# Allegro board USBHUB_V10A.brd
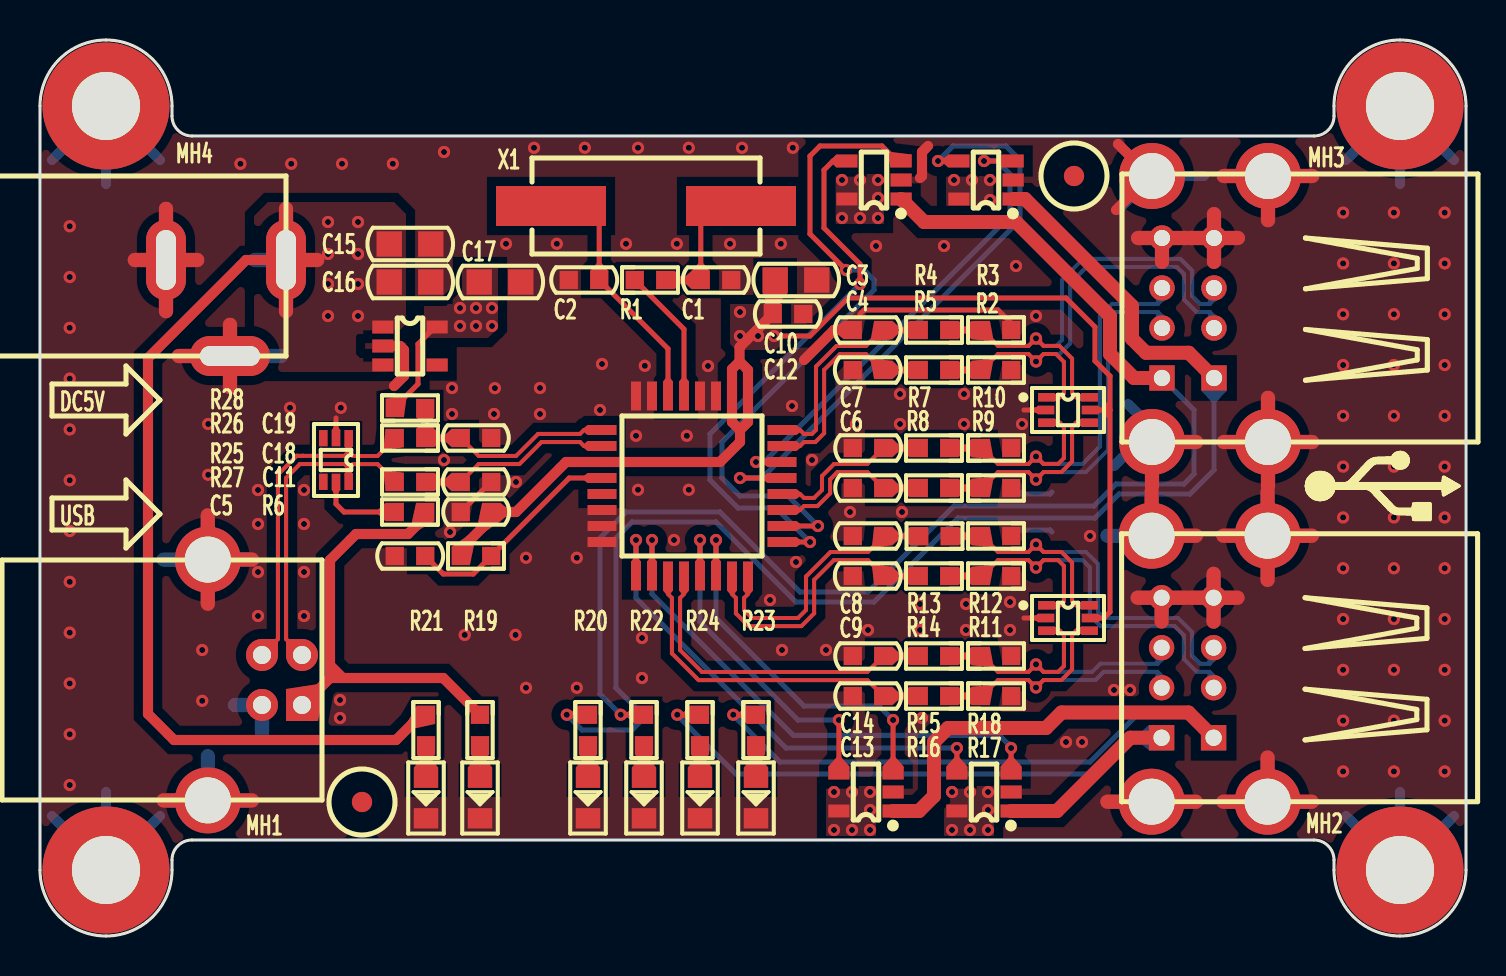
[diagram p0: board, top side]
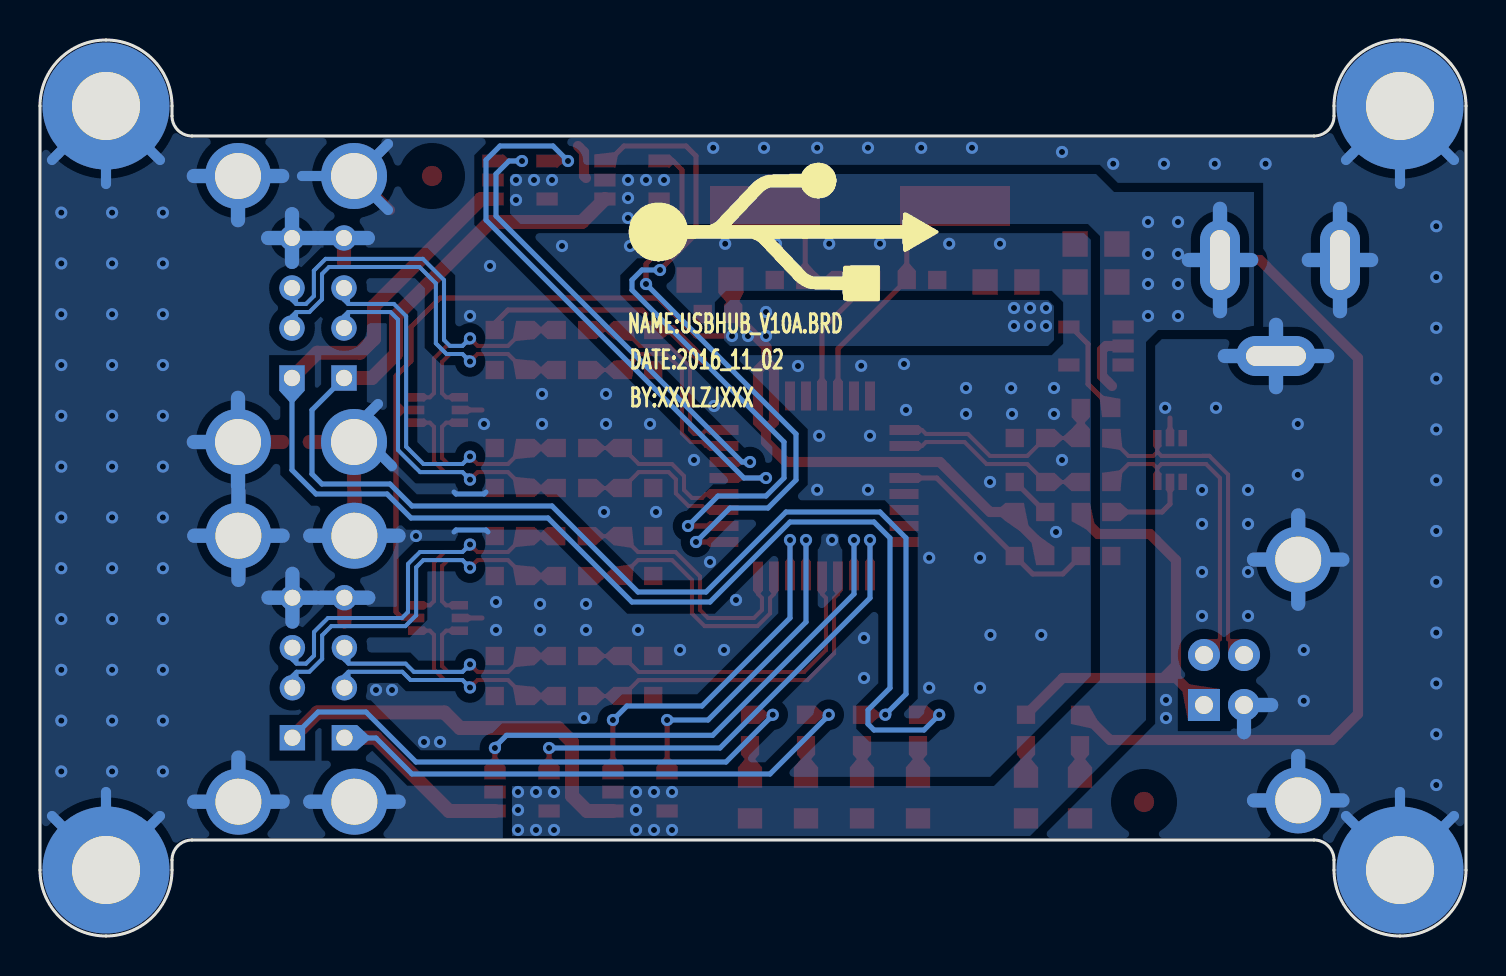
[diagram p1: board, bottom side, seen from below]

Outline 71.3 x 44.8 mm; copper layers: TOP, BOTTOM. Coordinates in mm from the lower left corner of the outline.
Outline path: 0,41.5 arc(0.97,43.83) 3.3,44.8 arc(5.63,43.83) 6.6,41.5 6.6,41 arc(6.89,40.29) 7.6,40 63.7,40 arc(64.41,40.29) 64.7,41 64.7,41.5 arc(65.67,43.83) 68,44.8 arc(70.33,43.83) 71.3,41.5 71.3,3.3 arc(70.33,0.97) 68,0 arc(65.67,0.97) 64.7,3.3 64.7,3.8 arc(64.41,4.51) 63.7,4.8 7.6,4.8 arc(6.89,4.51) 6.6,3.8 6.6,3.3 arc(5.63,0.97) 3.3,0 arc(0.97,0.97) 0,3.3 0,41.5

## Design rules (mm)
net group DP1: nets DM DP
net group DP2: nets DM0 DP0
net group DP3: nets D1+ D1-
net group DP4: nets D2+ D2-
net group DP5: nets D3+ D3-
net group DP6: nets D4+ D4-
net group DP7: nets DM1 DP1
net group DP8: nets DM2 DP2
net group DP9: nets DM3 DP3
net group DP10: nets DM4 DP4

## Placement (name value [footprint] x y rotation side)
C1  20pF_50V  [CC0603]  33.8 32.8 180 top
C2  20pF_50V  [CC0603]  27.2 32.8 0 top
C3  22pF_50V  [CC0603]  41.4 30.3 180 top
C4  22pF_50V  [CC0603]  41.4 28.3 180 top
C5  0.1uF_50V  [CC0603]  18.5 19 0 top
C6  22pF_50V  [CC0603]  41.4 22.4 0 top
C7  22pF_50V  [CC0603]  41.4 24.4 0 top
C8  22pF_50V  [CC0603]  41.4 20 180 top
C9  22pF_50V  [CC0603]  41.4 18 180 top
C10  10uF_25V  [CC0805]  37.8 32.8 0 top
C11  0.1uF_50V  [CC0603]  21.8 21.2 0 top
C12  0.1uF_50V  [CC0603]  37.4 31.1 180 top
C13  22pF_50V  [CC0603]  41.4 12 0 top
C14  22pF_50V  [CC0603]  41.4 14 0 top
C15  10uF_25V  [CC0805]  18.5 34.6 0 top
C16  10uF_25V  [CC0805]  18.5 32.7 0 top
C17  10uF_25V  [CC0805]  23 32.7 0 top
C18  22pF_50V  [CC0603]  21.8 22.7 180 top
C19  22pF_50V  [CC0603]  21.8 24.9 180 top
D1  LED_GREEN  [LED0805]  22 6.9 270 top
D2  LED_GREEN  [LED0805]  27.4 6.9 270 top
D3  LED_GREEN  [LED0805]  19.3 6.9 270 top
D4  LED_GREEN  [LED0805]  30.2 6.9 270 top
D5  LED_GREEN  [LED0805]  35.8 6.9 270 top
D6  LED_GREEN  [LED0805]  33 6.9 270 top
DC1  -  [DC005]  6.3 33.8 0 top
MH1  Hold  [HOLD250D134]  3.3 3.3 0 top
MH2  Hold  [HOLD250D134]  68 3.3 0 top
MH3  Hold  [HOLD250D134]  68 41.5 0 top
MH4  Hold  [HOLD250D134]  3.3 41.5 0 top
MP1  MarkPoint  [MARKPOINT_R3]  16.1 6.7 0 top
MP2  MarkPoint  [MARKPOINT_R3]  51.7 38 0 top
NOREF  -  []  0 5.1 0 top
NOREF#2  -  []  3.3 0 90 top
R1  1.5K  [RC0603]  30.5 32.8 180 top
R2  15K  [RC0603]  47.8 28.3 0 top
R3  15K  [RC0603]  47.8 30.3 0 top
R4  27R  [RC0603]  44.7 30.3 0 top
R5  27R  [RC0603]  44.7 28.3 0 top
R6  100K  [RC0603]  21.8 19 0 top
R7  27R  [RC0603]  44.7 24.4 0 top
R8  27R  [RC0603]  44.7 22.4 0 top
R9  15K  [RC0603]  47.8 22.4 180 top
R10  15K  [RC0603]  47.8 24.4 180 top
R11  15K  [RC0603]  47.8 18 0 top
R12  15K  [RC0603]  47.8 20 0 top
R13  27R  [RC0603]  44.72 19.99 0 top
R14  27R  [RC0603]  44.7 18 0 top
R15  27R  [RC0603]  44.7 14 0 top
R16  27R  [RC0603]  44.7 12 0 top
R17  15K  [RC0603]  47.8 12 180 top
R18  15K  [RC0603]  47.8 14 180 top
R19  2K  [RC0603]  22 10.3 90 top
R20  2K  [RC0603]  27.4 10.3 90 top
R21  2K  [RC0603]  19.3 10.3 90 top
R22  2K  [RC0603]  30.2 10.3 90 top
R23  2K  [RC0603]  35.8 10.3 90 top
R24  2K  [RC0603]  33 10.3 90 top
R25  27R  [RC0603]  18.5 22.7 0 top
R26  27R  [RC0603]  18.5 24.9 0 top
R27  10K  [RC0603]  18.5 21.2 0 top
R28  1.5K  [RC0603]  18.5 26.4 180 top
U1  TUSB2046BVFR  [LQFP-32]  32.6 22.5 270 top
U2  NUP4202W1T2G  [SC-88]  51.4 26.3 0 top
U3  NUP4202W1T2G  [SC-88]  51.4 15.9 0 top
U4  TPS2051BDBVR  [SOT23-5]  47.3 37.8 90 top
U5  TPS2051BDBVR  [SOT23-5]  41.7 37.8 90 top
U6  SPX3819M5-L-3-3/TR  [SOT23-5]  18.5 29.5 270 top
U7  TPS2051BDBVR  [SOT23-5]  41.3 7.2 90 top
U8  TPS2051BDBVR  [SOT23-5]  47.2 7.2 90 top
U9  NUP4202W1T2G  [SC-88]  14.8 23.8 270 top
USB1  -  [USB-A-DOUBLE]  56.1 31.4 0 top
USB2  -  [USB-A-DOUBLE]  56.08 13.41 0 top
USB3  -  [USB-B]  13.1 12.8 270 top
X1  XTAL_6MHz_X49SM6MSD2SC  [X-HC-49SMD]  30.3 36.5 0 top

## Library data of the parts
C1-C9 C11-C14 C18 C19 = CAP NP
C10 = C_Generic
C15-C17 = CAP NP_2
D1-D6 = LED_4
DC1 = DC005
MH1-MH4 = Hold_1
MP1 MP2 = MarkPoint
R1-R28 = R_Generic
U1 = TUSB2046BVFR
U2 U3 U9 = nup2202w1_D_2
U4 U5 U7 U8 = TPS2051BDBVR
U6 = SPX3819M5-L-1-2
USB1 USB2 = USB-A-DOUBLE
USB3 = USB-B
X1 = XTAL_5032_0

## Footprints (pads in the part's own frame, mm; a bottom-side part is the same pattern mirrored in y, then rotated)
CC0603
  rect 0.914x0.914 smd: 1(-0.762,0) 2(0.762,0)
CC0805
  rect 1.27x1.27 smd: 1(-1.041,0) 2(1.041,0)
DC005
  oval 2x4 hole 1x3: 1(6,0) 2(0,0)
  oval 4x2 hole 3x1: 3(3.2,-4.8)
HOLD250D134
  round 6.35 hole 3.404: 1(0,0)
LED0805
  rect 1.016x1.219 smd: 1(-1.016,0) 2(1.016,0)
LQFP-32
  rect 0.5x1.45 smd: 1(-2.8,-4.5) 2(-2,-4.5) 3(-1.2,-4.5) 4(-0.4,-4.5) 5(0.4,-4.5) 6(1.2,-4.5) 7(2,-4.5) 8(2.8,-4.5) 17(2.8,4.5) 18(2,4.5) 19(1.2,4.5) 20(0.4,4.5) 21(-0.4,4.5) 22(-1.2,4.5) 23(-2,4.5) 24(-2.8,4.5)
  rect 1.45x0.5 smd: 9(4.5,-2.8) 10(4.5,-2) 11(4.5,-1.2) 12(4.5,-0.4) 13(4.5,0.4) 14(4.5,1.2) 15(4.5,2) 16(4.5,2.8) 25(-4.5,2.8) 26(-4.5,2) 27(-4.5,1.2) 28(-4.5,0.4) 29(-4.5,-0.4) 30(-4.5,-1.2) 31(-4.5,-2) 32(-4.5,-2.8)
MARKPOINT_R3
  round 1.016 smd: 1(0,0)
RC0603
  rect 0.914x0.914 smd: 1(-0.762,0) 2(0.762,0)
SC-88
  rect 0.813x0.432 smd: 1(-1.092,0.635) 2(-1.092,0) 3(-1.092,-0.635) 4(1.092,-0.635) 5(1.092,0) 6(1.092,0.635)
SOT23-5
  rect 0.65x1.06 smd: 1(-0.95,-1.354) 2(0,-1.354) 3(0.95,-1.354) 4(0.95,1.354) 5(-0.95,1.354)
USB-A-DOUBLE
  rect 1.27x1.27 hole 0.813: 1(2.6,-3.5) 5(0,-3.5)
  round 1.27 hole 0.8: 2(2.6,-1) 3(2.6,1) 4(2.6,3.5) 6(0,-1) 7(0,1) 8(0,3.5)
  round 3.3 hole 2.3: 9(-0.5,6.6) 10(5.3,6.6) 11(5.3,-6.7) 12(-0.5,-6.7)
USB-B
  rect 1.6x1.6 hole 0.9: 1(1.25,0)
  round 1.6 hole 0.9: 2(-1.25,0) 3(-1.25,-2) 4(1.25,-2)
  round 3.3 hole 2.3: 5(6.02,-4.71) 6(-6.02,-4.71)
X-HC-49SMD
  rect 5.5x2 smd: 1(-4.75,0) 2(4.75,0)

## Nets
GND: C1.1 C2.1 C3.2 C4.2 C5.1 C6.1 C7.1 C8.2 C9.2 C10.2 C11.1 C12.1 C13.1 C14.1 C15.2 C16.2 C17.2 C18.1 C19.1 D1.2(CATHODE) D2.2(CATHODE) D3.2(CATHODE) D4.2(CATHODE) D5.2(CATHODE) D6.2(CATHODE) DC1.2 DC1.3 MH1.1 MH2.1 MH3.1 MH4.1 R2.2 R3.2 R9.1 R10.1 R11.2 R12.2 R17.1 R18.1 U1.6(EEDATA/GANGED) U1.7(GND_1) U1.8(BUSPWR) U1.27(TSTPLL/48MCLK) U1.28(GND_2) U1.31(TSTMODE) U1.32(SUSPEND) U2.2 U3.2 U4.2(GND) U5.2(GND) U6.2(GND) U7.2(GND) U8.2(GND) U9.2 USB1.4(GND_1) USB1.8(GND_2) USB1.9(S_1) USB1.10(S_2) USB1.11(S_3) USB1.12(S_4) USB2.4(GND_1) USB2.8(GND_2) USB2.9(S_1) USB2.10(S_2) USB2.11(S_3) USB2.12(S_4) USB3.4(GND) USB3.5(S1) USB3.6(S2)
VBUS: R19.2 R27.2 USB3.1(VBUS)
VCC_3V3: C10.1 C11.2 C12.2 C17.1 R6.1 R28.2 U1.3(VCC_1) U1.25(VCC_2) U1.26(E\X\T\M\E\M\) U2.5 U3.5 U6.5(VOUT)
VCC_+5V: C15.1 C16.1 DC1.1 R21.2 U4.5(IN) U5.5(IN) U6.1(VIN) U6.3(EN) U7.5(IN) U8.5(IN)
VCC_VOUT1: R24.2 U8.1(OUT) USB2.5(VCC_2)
VCC_VOUT2: R23.2 U7.1(OUT) USB2.1(VCC_1)
VCC_VOUT3: R22.2 U5.1(OUT) USB1.5(VCC_2)
VCC_VOUT4: R20.2 U4.1(OUT) USB1.1(VCC_1)
#EN1: U1.9(P\W\R\O\N\1\) U8.4(E\N\)
#EN2: U1.13(P\W\R\O\N\2\) U7.4(E\N\)
#EN3: U1.17(P\W\R\O\N\3\) U5.4(E\N\)
#EN4: U1.21(P\W\R\O\N\4) U4.4(E\N\)
#OC1: U1.10(O\C\1\) U8.3(O\C\)
#OC2: U1.14(O\C\2\) U7.3(O\C\)
#OC3: U1.18(O\C\3\) U5.3(O\C\)
#OC4: U1.22(O\C\4\) U4.3(O\C\)
D1+: R15.2 R18.2 U3.3 USB2.7(D+_2)
D1-: R16.2 R17.2 U3.4 USB2.6(D-_2)
D2+: R12.1 R13.2 U3.6 USB2.3(D+_1)
D2-: R11.1 R14.2 U3.1 USB2.2(D-_1)
D3+: R7.2 R10.2 U2.3 USB1.7(D+_2)
D3-: R8.2 R9.2 U2.4 USB1.6(D-_2)
D4+: R3.1 R4.2 U2.6 USB1.3(D+_1)
D4-: R2.1 R5.2 U2.1 USB1.2(D-_1)
DM: R25.1 U9.6 USB3.2(D-)
DM0: C18.2 R25.2 U1.2(DM0)
DM1: C13.2 R16.1 U1.11(DM1)
DM2: C9.1 R14.1 U1.15(DM2)
DM3: C6.2 R8.1 U1.19(DM3)
DM4: C4.1 R5.1 U1.23(DM4)
DP: R26.1 U9.1 USB3.3(D+)
DP0: C19.2 R26.2 R28.1 U1.1(DP0)
DP1: C14.2 R15.1 U1.12(DP1)
DP2: C8.1 R13.1 U1.16(DP2)
DP3: C7.2 R7.1 U1.20(DP3)
DP4: C3.1 R4.1 U1.24(DP4)
N16723135: C2.2 U1.30(XTAL1) X1.1
N16723141: C1.2 R1.1 X1.2
N16723193: D2.1(ANODE) R20.1
N16723303: R27.1 U9.5
N16750283: R1.2 U1.29(XTAL2)
N16751723: C5.2 R6.2 U1.4(R\E\S\E\T\)
N16761860: D4.1(ANODE) R22.1
N16762072: D5.1(ANODE) R23.1
N16762283: D6.1(ANODE) R24.1
N16762604: D1.1(ANODE) R19.1
N16762654: D3.1(ANODE) R21.1

Pads without a net: MP1 1; MP2 1; U1 5; U6 4; U9 3 4

## Via types
v1: diameter 0.61, hole 0.305, TOP to BOTTOM, 209 vias

## Routing (per net, layer and track width the routed paths; a pad name or vN(x,y) marks a point on that pad's centre or on a via; arc(x,y) is an arc through that point)
GND: length 260.5
  TOP w0.254: U9.2 14.8,25.9 ; U2.2 49.2,26.3 ; C11.1 22.54,22.7 C18.1 ; R3.2 48.56,30.64 47.9,31.3 41.2,31.3 41,31.1 ; U3.2 49.2,15.9
  TOP w0.508: USB1.9 55.5,38 ; 55.5,38 53.8,36.3 ; 55.5,38 53.9,39.6 ; C3.2 39.7,30.3 38.2,28.8 ; 17.7,27.5 18.2,28 18.2,29.3 18,29.5 U6.2 ; 44.4,39.5 44.1,39.2 44.1,38 44,37.9
  TOP w0.711: 57.49,16.91 USB2.4 ; USB2.4 58.68,18.11 ; USB2.4 58.68,15.72 ; USB2.4 59.87,16.91 ; 57.79,6.71 USB2.12 53.37,6.71 ; USB2.10 63.59,20.01 ; USB2.10 59.17,20.01 ; USB2.10 61.38,22.22 ; USB2.10 61.38,17.81 ; USB1.8 57.29,34.9 ; USB1.8 54.91,34.9 ; USB1.8 56.1,33.71 ; DC1.2 6.3,36.36 ; DC1.2 6.3,31.24 ; DC1.2 4.74,33.8 ; DC1.2 7.86,33.8 ; USB1.10 63.61,38 ; USB1.10 59.19,38 ; USB1.10 61.4,35.79 ; USB2.11 63.59,6.71 ; USB2.11 61.38,8.92 ; USB2.11 59.17,6.71 ; USB1.11 61.4,26.91 ; USB1.11 63.61,24.7 ; USB1.11 59.19,24.7 ; USB1.11 61.4,22.49 ; 57.51,34.9 USB1.4 ; USB1.4 58.7,33.71 ; USB1.4 58.7,36.09 ; USB1.4 59.89,34.9 ; 9.5,27.44 DC1.3 ; DC1.3 9.5,30.56 ; DC1.3 6.94,29 ; 55.6,22.49 USB1.12 57.81,24.7 ; 54.89,16.91 USB2.8 ; USB2.8 56.08,15.72 ; USB2.8 57.27,16.91 ; 10.6,6.78 USB3.5 6.18,6.78 ; 55.58,22.22 USB2.9 57.79,20.01 ; USB3.6 10.6,18.82 ; USB3.6 8.39,21.03 ; USB3.6 8.39,16.61
  BOTTOM w0.254: 48.9,20.2 49,20.3 50.5,20.3 50.6,20.2 ; 49,22.2 49.1,22.1 50.5,22.1 50.6,22.2
  BOTTOM w0.508: USB1.9 53.9,36.3 ; USB1.9 58.2,38 ; USB1.9 55.5,38 53.9,39.6 ; 54.4,26.6 55.6,25.4 USB1.12 54.9,24.7 53.7,23.5 ; MH2.1 68,7.2 ; MH2.1 65.3,6 ; MH2.1 70.7,6 ; MH3.1 70.7,38.8 ; MH3.1 65.3,38.8 ; MH3.1 68,37.6 ; MH1.1 0.6,6 ; MH1.1 6,6 ; MH1.1 3.3,7.2 ; MH4.1 0.6,38.8 ; MH4.1 6,38.8 ; MH4.1 3.3,37.6
  BOTTOM w0.711: DC1.3 12.06,29 ; DC1.3 9.5,27.44 ; DC1.3 9.5,30.56 ; DC1.3 6.94,29 ; USB2.11 63.59,6.71 ; USB2.11 61.38,8.92 ; USB2.11 59.17,6.71 ; 57.51,34.9 USB1.4 ; USB1.4 58.7,33.71 ; USB1.4 58.7,36.09 ; USB1.4 59.89,34.9 ; 53.37,20.01 USB2.9 57.79,20.01 ; 59.19,38 USB1.10 ; USB1.10 61.4,35.79 ; USB1.10 63.61,38 ; USB3.5 8.39,8.99 ; USB3.5 6.18,6.78 ; USB3.5 10.6,6.78 ; 54.89,16.91 USB2.8 57.27,16.91 ; USB2.4 59.87,16.91 ; USB2.4 58.68,15.72 ; USB2.4 58.68,18.11 ; USB2.4 57.49,16.91 ; 57.79,6.71 USB2.12 53.37,6.71 ; USB1.11 63.61,24.7 ; USB1.11 61.4,26.91 ; USB1.11 61.4,22.49 ; 59.17,20.01 USB2.10 ; USB2.10 63.59,20.01 ; USB2.10 61.38,22.22 ; USB2.10 61.38,17.81 ; USB3.6 8.39,21.03 ; USB3.6 6.18,18.82 ; USB3.6 10.6,18.82 ; USB3.6 8.39,16.61 ; 4.74,33.8 DC1.2 ; DC1.2 6.3,36.36 ; DC1.2 6.3,31.24 ; DC1.2 7.86,33.8 ; 57.29,34.9 USB1.8 54.91,34.9 ; 11.1,10.19 USB3.4 9.74,11.55
  vias: v1(1.49,35.49) v1(1.49,32.95) v1(1.49,30.41) v1(1.49,27.87) v1(1.49,25.33) v1(1.49,22.79) v1(1.49,20.25) v1(1.49,17.71) v1(1.49,15.17) v1(1.49,12.63) v1(1.49,10.09) v1(1.49,7.55) v1(8.11,14.3) v1(8.11,11.76) v1(8.41,25.6) v1(8.41,23.06) v1(10.02,38.61) v1(10.9,22.3) v1(10.9,20.6) v1(10.9,18.2) v1(10.9,16) v1(12.5,26.41) v1(12.56,38.61) v1(13.2,22.3) v1(13.2,20.6) v1(13.2,18.2) v1(13.2,16) v1(15.04,26.41) v1(15,11.8) v1(15,10.9) v1(15.1,38.61) v1(17.64,38.61) v1(20.2,39.2) v1(20.2,23.8) v1(20.5,20.2) v1(20.6,27.4) v1(20.6,26.1) v1(21.24,15.05) v1(22.74,27.39) v1(22.7,26.1) v1(23.3,34.61) v1(23.8,22.7) v1(23.78,15.05) v1(24.3,18.91) v1(24.3,12.41) v1(24.7,39.41) v1(25,27.4) v1(25,26.1) v1(25.84,34.61) v1(26.84,18.91) v1(26.84,12.41) v1(27.24,39.41) v1(28,26.3) v1(28.1,28.6) v1(29.3,34.61) v1(29.8,25.01) v1(29.9,39.41) v1(29.9,22.31) v1(30.1,14.9) v1(30.1,12.9) v1(30.24,28.51) v1(31.7,19.8) v1(31.84,34.61) v1(32.34,25.01) v1(32.44,39.41) v1(32.44,22.31) v1(33.4,28.5) v1(34.5,34.61) v1(35.1,39.41) v1(36.5,16.8) v1(37.04,34.61) v1(37.1,14.3) v1(37.64,39.41) v1(37.6,26.5) v1(37.8,18.7) v1(38.6,23.8) v1(39.3,14.3) v1(40.5,21.2) v1(40.8,25.6) v1(41.4,15.3) v1(41.8,34.5) v1(43,27.1) v1(43,25.6) v1(43.1,21.2) v1(44,16.6) v1(44,15.3) v1(44.1,10.9) v1(45.2,34.5) v1(46.2,27.1) v1(46.2,25.6) v1(46.3,16.6) v1(46.3,15.3) v1(48.5,16.7) v1(48.5,15.3) v1(48.8,33.5) v1(49.1,25.6) v1(49.8,31) v1(51.3,9.7) v1(52.1,9.7) v1(52.5,20) v1(53.7,12.3) v1(54.5,12.3) v1(65.16,36.17) v1(65.16,33.63) v1(65.16,31.09) v1(65.16,28.55) v1(65.16,26.01) v1(65.16,23.47) v1(65.16,20.93) v1(65.16,18.39) v1(65.16,15.85) v1(65.16,13.31) v1(65.16,10.77) v1(65.16,8.23) v1(67.7,36.17) v1(67.7,33.63) v1(67.7,31.09) v1(67.7,28.55) v1(67.7,26.01) v1(67.7,23.47) v1(67.7,20.93) v1(67.7,18.39) v1(67.7,15.85) v1(67.7,13.31) v1(67.7,10.77) v1(67.7,8.23) v1(70.24,36.17) v1(70.24,33.63) v1(70.24,31.09) v1(70.24,28.55) v1(70.24,26.01) v1(70.24,23.47) v1(70.24,20.93) v1(70.24,18.39) v1(70.24,15.85) v1(70.24,13.31) v1(70.24,10.77) v1(70.24,8.23)
VBUS: length 22
  TOP w0.508: 14.5,12.9 13.15,11.55 USB3.1 ; 14.5,12.9 20.16,12.9 R19.2 ; 14.5,12.9 14.5,18.8 15.8,20.1 18.4,20.1 19.26,20.96 R27.2
VCC_3V3: length 68.9
  TOP w0.254: 53.5,26.3 53.5,28 52.75,28.75 52.75,30.45 51.3,31.9 40.4,31.9 38.5,30 v1(36.7,30) 36.8,29.9 ; 53.5,26.3 53.5,16.2 53.2,15.9 U3.5 ; 53.5,26.3 U2.5 ; R28.2 17.74,26.44 18.9,27.6 18.9,29.6 19.75,30.45 U6.5
  TOP w0.508: 34.98,28.72 34.98,29.44 C12.2 36.64,32.68 C10.1 ; 34.98,28.72 35.4,28.3 U1.25 35.4,25.7 35,25.3 ; 34.98,28.72 34.6,28.34 U1.26 34.6,25.7 35,25.3 ; 35,25.3 35,24.7 34,23.7 U1.3 26.3,23.7 23.8,21.2 C11.2 22.56,20.86 21.04,19.34 R6.1
  vias: v1(21,31.4) v1(21,30.5) v1(21.8,31.4) v1(21.8,30.5) v1(22.6,31.4) v1(22.6,30.5) v1(35,31.2) v1(35,30) v1(35.9,30)
VCC_+5V: length 56.6
  TOP w0.508: DC1.1 10.3,33.8 5.4,28.9 5.4,11.1 6.7,9.8 17.8,9.8 19.06,11.06 R21.2
  TOP w0.711: 12.3,31.24 DC1.1 ; DC1.1 12.3,36.36 ; DC1.1 13.86,33.8
  BOTTOM w0.711: 12.3,31.24 DC1.1 ; DC1.1 13.86,33.8 ; DC1.1 12.3,36.36 ; DC1.1 10.74,33.8
  vias: v1(14.4,35.7) v1(14.4,34.1) v1(14.4,32.6) v1(14.4,31) v1(15.9,35.7) v1(15.9,34.1) v1(15.9,32.6) v1(15.9,31) v1(39.7,7.2) v1(39.7,5.3) v1(40.1,37.8) v1(40.1,35.9) v1(40.6,7.2) v1(40.6,5.3) v1(41,37.8) v1(41,35.9) v1(41.5,7.2) v1(41.5,6.3) v1(41.5,5.3) v1(41.9,37.8) v1(41.9,36.9) v1(41.9,35.9) v1(45.6,7.2) v1(45.6,5.3) v1(45.7,37.8) v1(46.5,7.2) v1(46.5,5.3) v1(46.6,37.8) v1(47.4,7.2) v1(47.4,6.3) v1(47.4,5.3) v1(47.5,37.8) v1(47.5,36.8)
VCC_VOUT1: length 36.4
  TOP w0.254: R24.2 v1(31.86,11.06)
  TOP w0.7: USB2.5 54.51,9.91 50.85,6.25 U8.1
  BOTTOM w0.254: v1(31.86,11.06) 31.86,11.04 34.8,8.1 52.7,8.1 54.5,9.9 56.07,9.9 USB2.5
VCC_VOUT2: length 47.9
  TOP w0.254: R23.2 v1(34.66,11.06)
  TOP w0.7: USB2.1 58.68,9.92 57.42,11.18 51.08,11.18 50.3,10.4 45.4,10.4 44.7,9.7 44.7,7 43.95,6.25 U7.1
  BOTTOM w0.254: USB2.1 57.39,11.2 55,11.2 52.5,8.7 37,8.7 34.66,11.04 v1(34.66,11.06)
VCC_VOUT3: length 68.1
  TOP w0.254: R22.2 v1(29.04,11.06)
  TOP w0.7: USB1.5 54.7,27.9 53.5,29.1 53.5,31 48.8,35.7 44.2,35.7 U5.1
  BOTTOM w0.254: USB1.5 57.7,26.3 57.7,23.1 57.2,22.6 53.8,22.6 52.7,21.5 45.7,21.5 41.4,17.2 38,17.2 34,21.2 29.3,21.2 28,19.9 28,12.1 v1(29.04,11.06)
VCC_VOUT4: length 68.8
  TOP w0.254: R20.2 v1(26.34,11.06)
  TOP w0.7: USB1.1 57.44,29.16 55.3,29.16 54.6,29.86 54.6,31.5 49.25,36.85 U4.1
  BOTTOM w0.254: v1(26.34,11.06) 27.1,10.3 29.6,10.3 29.9,10.6 29.9,11.3 28.8,12.4 28.8,19.9 29.6,20.7 33.8,20.7 37.8,16.7 41.7,16.7 45.9,20.9 52.75,20.9 53.95,22.1 57.5,22.1 58.7,23.3 USB1.1
#EN1: length 25.1
  TOP w0.254: U1.9 v1(29.8,19.8) ; U8.4 v1(45.85,9.4)
  BOTTOM w0.254: v1(29.8,19.8) 29.8,16.9 37.3,9.4 v1(45.85,9.4)
#EN2: length 17.5
  TOP w0.254: U7.4 v1(39.95,10.8) ; v1(33,19.8) U1.13
  BOTTOM w0.254: v1(39.95,10.8) 37.9,10.8 33,15.7 v1(33,19.8)
#EN3: length 28.4
  TOP w0.254: U1.17 v1(38.5,19.7) ; v1(41,32.6) 41,33.6 39.2,35.4 39.2,38.3 39.65,38.75 U5.4
  BOTTOM w0.254: v1(38.5,19.7) 36.8,21.4 34.9,21.4 33.5,22.8 33.5,25.1 v1(41,32.6)
#EN4: length 30.2
  TOP w0.254: U1.21 v1(35,22.9) ; U4.4 v1(44.9,38.75)
  BOTTOM w0.254: v1(35,22.9) 36.1,22.9 49,35.8 49,38.8 48.3,39.5 45.65,39.5 v1(44.9,38.75)
#OC1: length 26.9
  TOP w0.254: v1(30.6,19.8) U1.10 ; U8.3 v1(48.55,9.4)
  BOTTOM w0.254: v1(48.55,9.4) 48.55,9.45 47.97,10.04 37.66,10.04 30.6,17.1 v1(30.6,19.8)
#OC2: length 19.3
  TOP w0.254: v1(33.8,19.8) U1.14 ; U7.3 v1(42.65,10.8)
  BOTTOM w0.254: v1(42.65,10.8) 41.95,11.5 38.2,11.5 33.8,15.9 v1(33.8,19.8)
#OC3: length 33.8
  TOP w0.254: U1.18 v1(38.9,20.5) ; U5.3 42.85,38.75 42.1,39.5 39,39.5 38.5,39 38.5,35.1 v1(40.3,33.3)
  BOTTOM w0.254: v1(38.9,20.5) 37.4,22 35,22 34.1,22.9 34.1,24.7 41.7,32.3 41.7,32.8 41.2,33.3 v1(40.3,33.3)
#OC4: length 24.2
  TOP w0.254: U1.22 v1(35.8,23.7) ; U4.3 v1(47.2,38.75)
  BOTTOM w0.254: v1(35.8,23.7) 36.2,23.7 48.5,36 48.5,38.1 47.85,38.75 v1(47.2,38.75)
D1+: length 16.3
  TOP w0.203: R15.2 R18.2 47.11,14 47.9,13.21 49.42,13.21 v1(49.8,13.58) 50.18,13.21 50.91,13.21 51.2,13.5 51.2,15.06 50.99,15.27 U3.3
  BOTTOM w0.203: v1(49.8,13.58) 50.18,13.21 52.61,13.21 53.02,13.62 55.88,13.62 56.08,13.82 USB2.7
D1-: length 17
  TOP w0.203: R16.2 R17.2 47.1,12 47.9,12.8 49.42,12.8 v1(49.8,12.42) 50.18,12.8 51.07,12.8 51.6,13.33 51.6,15.06 51.81,15.27 U3.4
  BOTTOM w0.203: v1(49.8,12.42) 50.18,12.8 52.77,12.8 53.19,13.21 55.88,13.21 56.08,13.01 USB2.6
D2+: length 24
  TOP w0.203: U3.6 51.81,16.54 51.6,16.74 51.6,18.67 51.07,19.2 50.18,19.2 v1(49.8,19.58) 49.42,19.2 47.9,19.2 47.1,20 R12.1 47.03,19.99 R13.2
  BOTTOM w0.203: USB2.3 58.68,13.82 58.48,13.62 58,13.62 57.6,14.02 57.6,15.2 56.9,15.9 53.2,15.9 52.9,16.2 52.9,18.6 52.3,19.2 50.18,19.2 v1(49.8,19.58)
D2-: length 23.4
  TOP w0.203: U3.1 50.99,16.54 51.2,16.74 51.2,18.5 50.91,18.79 50.18,18.79 v1(49.8,18.42) 49.42,18.79 47.9,18.79 47.11,18 R11.1 R14.2
  BOTTOM w0.203: v1(49.8,18.42) 50.18,18.79 52.13,18.79 52.49,18.43 52.49,16.03 53.03,15.49 56.73,15.49 57.19,15.03 57.19,13.85 57.83,13.21 58.48,13.21 58.68,13.01 USB2.2
D3+: length 23.3
  TOP w0.203: U2.3 50.99,25.66 51.2,25.46 51.2,23.9 50.91,23.61 50.17,23.61 v1(49.8,23.98) 49.42,23.6 47.9,23.6 47.1,24.4 R10.2 R7.2
  BOTTOM w0.203: v1(49.8,23.98) 50.18,23.6 52.13,23.6 52.99,24.47 52.99,30.99 53.6,31.6 55.9,31.6 56.1,31.81 USB1.7
D3-: length 24
  TOP w0.203: R8.2 R9.2 47.11,22.4 47.9,23.19 49.42,23.19 v1(49.8,22.82) 50.18,23.2 51.07,23.2 51.6,23.73 51.6,25.46 51.81,25.66 U2.4
  BOTTOM w0.203: v1(49.8,22.82) 50.18,23.19 52.29,23.19 53.4,24.3 53.4,30.83 53.77,31.2 55.9,31.2 56.1,30.99 USB1.6
D4+: length 24.7
  TOP w0.203: R4.2 R3.1 47.11,30.3 47.9,29.51 49.42,29.51 v1(49.8,29.88) 50.18,29.51 50.97,29.51 51.6,28.87 51.6,27.14 51.81,26.93 U2.6
  BOTTOM w0.203: USB1.3 58.7,31.81 58.5,31.6 58,31.6 57.61,32 57.61,33.27 57.02,33.86 52.16,33.86 51.1,32.8 51.1,29.8 50.81,29.51 50.18,29.51 v1(49.8,29.88)
D4-: length 24.1
  TOP w0.203: R5.2 R2.1 47.1,28.3 47.9,29.1 49.42,29.1 v1(49.8,28.72) 50.18,29.1 50.8,29.1 51.2,28.7 51.2,27.14 50.99,26.93 U2.1
  BOTTOM w0.203: v1(49.8,28.72) 50.18,29.1 50.97,29.1 51.51,29.63 51.51,32.63 52.32,33.45 56.85,33.45 57.2,33.1 57.2,31.83 57.83,31.2 58.5,31.2 58.7,30.99 USB1.2
DM: length 16.2
  TOP w0.203: 15.44,23.38 15.64,23.59 16.88,23.59 17.74,22.73 R25.1 ; 15.44,23.38 U9.6 ; 15.44,23.38 15.44,23.39 15.23,23.6 13,23.6 ; 13,23.6 12.3,22.9 12.3,14.85 USB3.2 ; 13,23.6 13,23.6
DM0: length 9.7
  TOP w0.203: U1.2 27.2,24.5 27,24.7 25.07,24.7 23.97,23.6 21.93,23.6 C18.2 R25.2
DM1: length 17.2
  TOP w0.203: R16.1 C13.2 41.37,12.79 32.93,12.79 31.6,14.13 31.6,16.9 31.4,17.1 U1.11
DM2: length 14.1
  TOP w0.203: R14.1 C9.1 42.16,18.03 41.4,18.79 39.69,18.79 38.71,17.81 38.71,16.13 38.07,15.49 35.43,15.49 34.8,16.13 34.8,16.9 34.6,17.1 U1.15
DM3: length 8.4
  TOP w0.203: U1.19 38,21.3 38.2,21.5 38.87,21.5 39.51,22.13 39.51,22.83 39.87,23.19 41.37,23.19 C6.2 R8.1
DM4: length 10.9
  TOP w0.203: U1.23 38,24.5 38.2,24.7 38.77,24.7 39.21,25.14 39.21,28.31 39.99,29.09 41.3,29.09 42.09,28.3 C4.1 R5.1
DP: length 17.2
  TOP w0.203: 15.44,24.21 15.23,24.01 13.17,24.01 ; 15.44,24.21 15.44,24.2 15.64,24 16.88,24 17.74,24.86 R26.1 ; 15.44,24.21 U9.1 ; 13.17,24.01 12.83,24.01 ; 13.17,24.01 12.83,24.01 ; 12.83,24.01 11.9,23.07 11.9,14.85 USB3.3
DP0: length 11.2
  TOP w0.203: R28.1 R26.2 C19.2 21.93,24 23.8,24 24.9,25.1 27,25.1 27.2,25.3 U1.1
DP1: length 16.5
  TOP w0.203: U1.12 32.2,17.1 32,16.9 32,14.3 33.1,13.2 41.36,13.2 C14.2 R15.1
DP2: length 13.4
  TOP w0.203: R13.1 42.17,19.99 C8.1 42.16,19.96 41.4,19.2 39.53,19.2 38.3,17.97 38.3,16.3 37.9,15.9 35.6,15.9 35.2,16.3 35.2,16.9 35.4,17.1 U1.16
DP3: length 8.4
  TOP w0.203: U1.20 38,22.1 38.2,21.9 38.7,21.9 39.1,22.3 39.1,23 39.7,23.6 41.36,23.6 C7.2 R7.1
DP4: length 10.9
  TOP w0.203: U1.24 38,25.3 38.2,25.1 38.6,25.1 38.8,25.31 38.8,28.47 39.83,29.5 41.3,29.5 42.1,30.3 C3.1 R4.1
N16723135: length 13.1
  TOP w0.254: U1.30 31.4,29.36 C2.2 27.96,36.04 27.5,36.5 X1.1
N16723141: length 7.2
  TOP w0.254: R1.1 C1.2 33.04,36.04 33.5,36.5 X1.2
N16723193: length 1.6
  TOP w0.508: R20.1 D2.1
N16723303: length 4.2
  TOP w0.254: U9.5 14.8,21.6 15.2,21.2 R27.1
N16750283: length 6.8
  TOP w0.254: R1.2 32.2,30.34 U1.29
N16751723: length 11.2
  TOP w0.254: U1.4 26.46,22.9 R6.2 21.66,18.1 20.16,18.1 C5.2
N16761860: length 1.6
  TOP w0.508: R22.1 D4.1
N16762072: length 1.6
  TOP w0.508: R23.1 D5.1
N16762283: length 1.6
  TOP w0.508: R24.1 D6.1
N16762604: length 1.6
  TOP w0.508: R19.1 D1.1
N16762654: length 1.6
  TOP w0.508: R21.1 D3.1

## Copper pours and planes (outline as drawn; the poured copper is in the pictures)
GND on TOP: 0.1,41.5 3.3,44.7 6.5,41.5 6.5,41 6.81,40.21 7.6,39.9 63.7,39.9 64.49,40.21 64.8,41 64.8,41.5 68,44.7 71.2,41.5 71.2,3.3 68,0.1 64.8,3.3 64.8,3.8 64.5,4.6 63.7,4.9 7.6,4.9 6.81,4.59 6.5,3.8 6.5,3.3 3.3,0.1 0.1,3.3 ; 4 cut-outs
GND on BOTTOM: 0.1,41.5 3.3,44.7 6.5,41.5 6.5,41 6.81,40.21 7.6,39.9 63.7,39.9 64.49,40.21 64.8,41 64.8,41.5 68,44.7 71.2,41.5 71.2,3.3 68,0.1 64.8,3.3 64.8,3.8 64.5,4.6 63.7,4.9 7.6,4.9 6.81,4.59 6.5,3.8 6.5,3.3 3.3,0.1 0.1,3.3
VBUS on TOP (solid shape): 13.95,12.6 14.13,12.53 14.2,12.34 13.9,10.75 13.05,11.51 12.3,12.35
VCC_3V3 on TOP: 37.1,31.6 34.5,31.6 34.5,29.6 34.8,29.3 36.8,29.3 37.1,29.6
VCC_3V3 on TOP: 19.2,29.9 22.4,29.9 22.9,30.4 22.9,33.5 21.1,33.5 21.1,32.3 20.3,31.5 19.2,31.5
VCC_3V3 on BOTTOM: 20.9,31.8 36.8,31.8 37.1,31.5 37.1,29.8 36.8,29.5 20.9,29.5 20.6,29.8 20.6,31.5
VCC_+5V on TOP: 17.7,28.2 10.9,28.2 10.7,28.4 10.7,36 11.4,36.7 17.7,36.7 18.3,36.1 18.3,30.6 17.8,30.1 15.9,30.1 15.8,30 15.8,29.1 16,28.9 17.7,28.9
VCC_+5V on TOP: 39.7,38.1 39.7,35.6 42.2,35.6 42.2,38.1
VCC_+5V on TOP: 39.3,7.5 39.3,5 41.8,5 41.8,7.5
VCC_+5V on TOP: 45.3,38.1 45.3,35.6 47.8,35.6 47.8,38.1
VCC_+5V on TOP: 45.2,7.5 45.2,5 47.7,5 47.7,7.5
VCC_+5V on BOTTOM: 21.8,5 16,10.8 16,29.7 15.4,30.3 10.6,30.3 10.6,37.2 17.6,37.2 18.5,38.1 47.8,38.1 47.8,36.1 47.3,35.6 18.9,35.6 18.3,35 18.3,12.8 23.6,7.5 47.7,7.5 47.7,5
VBUS on TOP (solid shape): 19.3,21.25 19.72,20.74 18.87,20.26 18.65,20.3 18.55,20.5 18.8,21.66
VCC_3V3 on TOP (solid shape): 18.19,27.02 18.28,26.99 18.32,26.9 18.2,25.94 17.72,26.38 17.28,26.86
VCC_3V3 on TOP (solid shape): 37.39,32.16 36.78,31.45 36.61,31.41 36.46,31.48 36.12,32.16 36.77,32.86
VCC_3V3 on TOP (solid shape): 21.41,20.03 21.64,20 21.75,19.8 21.5,18.54 21.01,18.95 20.58,19.46
VCC_3V3 on TOP (solid shape): 22.59,21.25 23.02,20.74 22.19,20.17 21.96,20.2 21.85,20.4 22.1,21.66
VCC_+5V on TOP (solid shape): 19.35,11.1 19.76,10.6 18.6,10.35 18.4,10.45 18.36,10.67 18.84,11.52
VCC_VOUT1 on BOTTOM (solid shape): 56.11,9.91 55.45,9.28 54.83,9.82 54.8,9.9 54.82,9.98 55.45,10.55
VCC_VOUT4 on BOTTOM (solid shape): 59.34,27.27 58.78,26.66 58.7,26.63 58.62,26.66 58.06,27.27 58.7,27.93
D1+ on TOP (solid shape): 47.66,13.55 47.64,13.47 47.56,13.44 46.58,13.54 47.02,14.02 47.5,14.46
D1- on TOP (solid shape): 47.56,12.56 47.63,12.53 47.66,12.45 47.5,11.54 47.02,11.98 46.58,12.46
D2+ on TOP (solid shape): 47.66,19.55 47.63,19.47 47.56,19.44 46.58,19.54 47.02,20.02 47.5,20.46
D2- on TOP (solid shape): 47.56,18.56 47.64,18.53 47.66,18.45 47.5,17.54 47.02,17.98 46.58,18.46
D3+ on TOP (solid shape): 47.66,23.95 47.63,23.87 47.56,23.84 46.58,23.94 47.02,24.42 47.5,24.86
D3- on TOP (solid shape): 47.56,22.96 47.64,22.93 47.66,22.85 47.5,21.94 47.02,22.38 46.58,22.86
D4+ on TOP (solid shape): 47.66,29.85 47.64,29.77 47.56,29.74 46.58,29.84 47.02,30.32 47.5,30.76
D4- on TOP (solid shape): 47.56,28.86 47.63,28.83 47.66,28.75 47.5,27.84 47.02,28.28 46.58,28.76
DM on TOP (solid shape): 17.18,23.19 17.21,23.26 17.28,23.29 18.2,23.16 17.76,22.68 17.28,22.24
DM2 on TOP (solid shape): 41.6,18.49 41.63,18.56 41.71,18.59 42.62,18.46 42.18,17.98 41.7,17.54
DM4 on TOP (solid shape): 42.62,28.76 42.18,28.28 41.7,27.84 41.54,28.75 41.56,28.83 41.64,28.86
DP on TOP (solid shape): 17.76,24.92 18.2,24.44 17.29,24.3 17.21,24.33 17.18,24.4 17.28,25.36
DP2 on TOP (solid shape): 42.18,20.02 42.62,19.54 41.71,19.4 41.63,19.43 41.6,19.5 41.7,20.46
DP4 on TOP (solid shape): 42.18,30.32 42.62,29.84 41.64,29.74 41.57,29.77 41.54,29.85 41.7,30.76
N16723193 on TOP (solid shape): 27.27,9 27.4,9.03 27.53,9 28.01,8.42 27.4,7.85 26.79,8.42
N16761860 on TOP (solid shape): 30.07,9 30.2,9.03 30.33,9 30.81,8.42 30.2,7.85 29.59,8.42
N16762072 on TOP (solid shape): 35.67,9 35.8,9.03 35.93,9 36.41,8.42 35.8,7.85 35.19,8.42
N16762283 on TOP (solid shape): 32.87,9 33,9.03 33.13,9 33.61,8.42 33,7.85 32.39,8.42
N16762604 on TOP (solid shape): 21.87,9 22,9.03 22.13,9 22.61,8.42 22,7.85 21.39,8.42
N16762654 on TOP (solid shape): 19.17,9 19.3,9.03 19.43,9 19.91,8.42 19.3,7.85 18.69,8.42

Small or netless copper shapes (teardrops, artwork), in the pictures only: 142 on TOP, 36 on BOTTOM

## Text on the board
Ref Des/Silkscreen Bottom: DATE:2016_11_02 | BY:XXXLZJXXX | NAME:USBHUB_V10A.BRD
Ref Des/Silkscreen Top: DC5V | USB
BODY_CENTER: FIGURE | SIZE | 0.3048 | 0.8 | 0.8128 | 0.9 | 2.3 | 3.4036 | 3.0x1.0 | DRILL CHART: TOP to BOTTOM | ALL UNITS ARE IN MILLIMETERS | PLATED | QTY | 209 | 12 | 4 | 10 | 2 | 1
